# EAGLE board new_board (EAGLE 7.5.0)
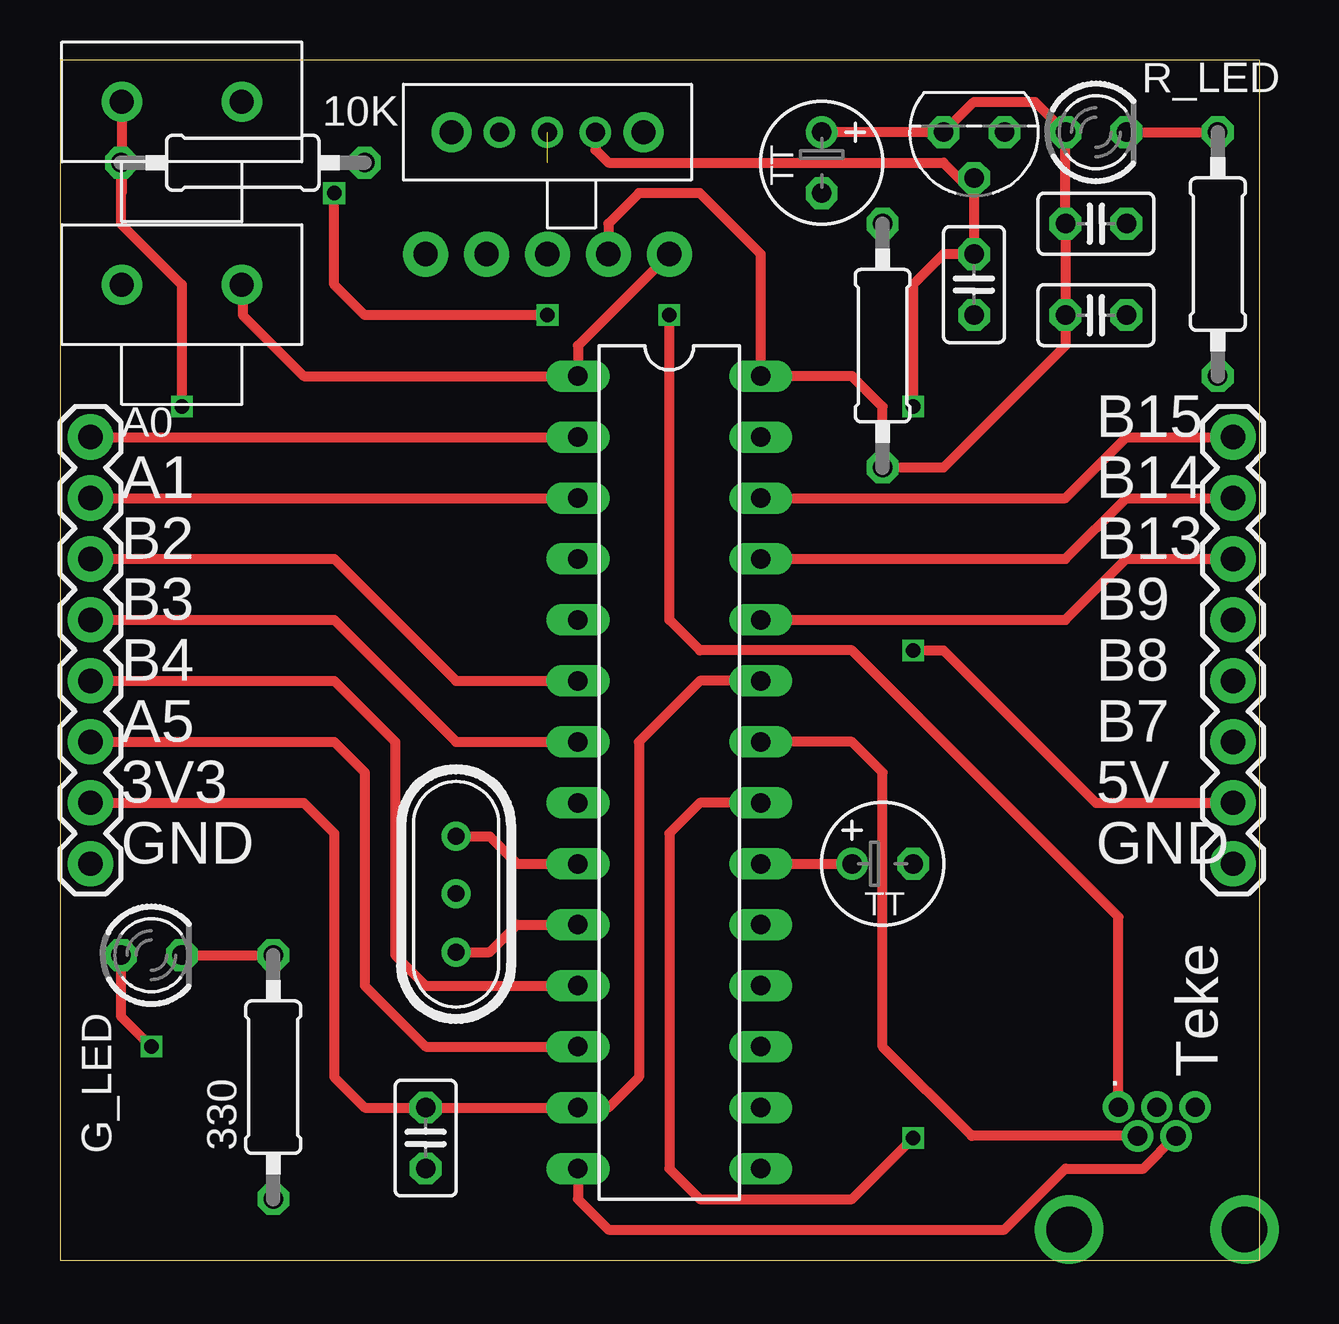
[diagram p0: board, top side]
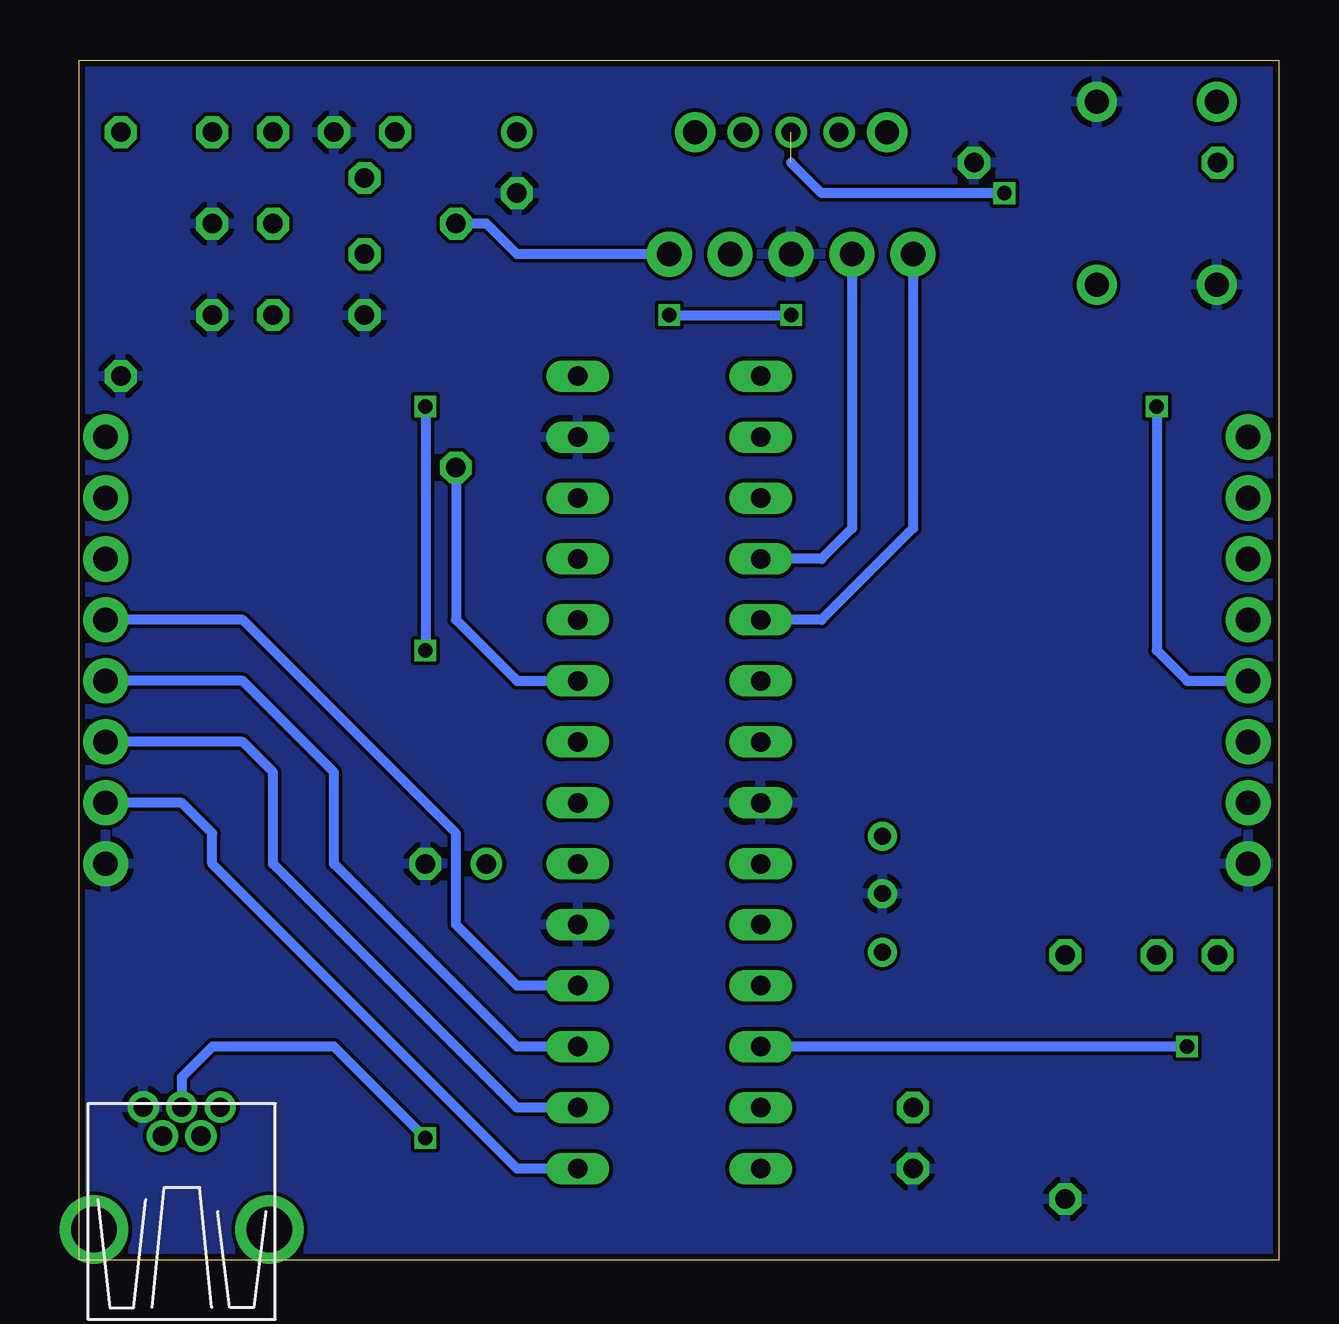
[diagram p1: board, bottom side, seen from below]

Size 50 x 50 mm. Coordinates in mm from the lower left corner, seen from the top.
Outline: 0,0 50,0 50,50 0,50 0,0
Copper layers (1*16): Top 0.035mm / dielectric 1.5mm / Bottom 0.035mm
Design rules "SeeedStudio_2layer_DRU_no_angle_20140221": minimum track width 6mil, minimum drill 12mil, track to track 6mil, track to pad 6mil, pad to pad 6mil, via to via 6mil, smd to smd 0mil, copper to edge 10mil, drill to drill 10mil, minimum pad ring 10mil, minimum via ring 6mil, stop-mask expansion 2mil, vias tented up to drill 100mil, thermal gap 10mil

## Footprints (pad centres in the part's own frame; a part is rotated, then mirrored left to right if it is on the bottom)
0207/10 = drill 0.813 octagon: 1 -5.08,0; 2 5.08,0
USB-MB-H = drill 0.8: D+ 5.1,0; D- 3.9,0.8; GND 5.1,-1.6; ID 3.9,-0.8; VBUS 5.1,1.6 | drill 1.9: P$6 0,-3.65; P$7 0,3.65
C025-025X050 = drill 0.813 octagon: 1 -1.27,0; 2 1.27,0
TT2D5 = drill 0.813: + -1.27,0 | drill 0.813 octagon: - 1.27,0
LED3MM = drill 0.813 octagon: A -1.27,0; K 1.27,0
1X05_NO_SILK = drill 1.016 pad 1.88: 1 0,0; 2 2.54,0; 3 5.08,0; 4 7.62,0; 5 10.16,0
1X08_ROUND = drill 1.016 pad 1.88: 1 0,0; 2 2.54,0; 3 5.08,0; 4 7.62,0; 5 10.16,0; 6 12.7,0; 7 15.24,0; 8 17.78,0
DIL28-3 = drill 0.813 long: 1 -16.51,-3.81; 2 -13.97,-3.81; 3 -11.43,-3.81; 4 -8.89,-3.81; 5 -6.35,-3.81; 6 -3.81,-3.81; 7 -1.27,-3.81; 8 1.27,-3.81; 9 3.81,-3.81; 10 6.35,-3.81; 11 8.89,-3.81; 12 11.43,-3.81; 13 13.97,-3.81; 14 16.51,-3.81; 15 16.51,3.81; 16 13.97,3.81; 17 11.43,3.81; 18 8.89,3.81; 19 6.35,3.81; 20 3.81,3.81; 21 1.27,3.81; 22 -1.27,3.81; 23 -3.81,3.81; 24 -6.35,3.81; 25 -8.89,3.81; 26 -11.43,3.81; 27 -13.97,3.81; 28 -16.51,3.81
SLIDE_SWITCH = drill 1 pad 1.676: P$1 -4,0; P$2 4,0 | drill 0.8 pad 1.27: P$3 -2,0; P$4 0,0; P$5 2,0
PUSH_BUTTON = drill 1 pad 1.676: P$1 -2.5,0; P$2 2.5,0
TO92 = drill 0.813 octagon: 1 -1.27,0; 2 0,1.905; 3 1.27,0
HC49-3L = drill 0.7 pad 1.2: 1 -2.413,0; 2 -0.027,0; 3 2.413,0

## Placement (x,y rotation side)
10K  [0207/10]  7.62,45.72 0 top
330  [0207/10]  8.89,7.62 90 top
.  MINI_USB  [USB-MB-H]  45.72,1.27 90 top
C1  0.1uF  [C025-025X050]  43.18,43.18 0 top
C3  0.1uF  [C025-025X050]  43.18,39.37 0 top
C4  0.1uF  [C025-025X050]  15.24,5.08 270 top
C5  0.1uF  [C025-025X050]  38.1,40.64 270 top
C6  10uF  [TT2D5]  34.29,16.51 0 top
C7  10uF  [TT2D5]  31.75,45.72 270 top
G_LED  [LED3MM]  3.81,12.7 0 top
J1  [1X05_NO_SILK]  25.4,41.91 180 top
J2  [1X08_ROUND]  1.27,34.29 270 top
J3  [1X08_ROUND]  48.9,34.29 270 top
R2  330  [0207/10]  48.26,41.91 90 top
R4  10K  [0207/10]  34.29,38.1 90 top
R_LED  [LED3MM]  43.18,46.99 0 top
U$1  PIC32  [DIL28-3]  25.4,20.32 270 top
U$3  SLIDE_SWITCH  [SLIDE_SWITCH]  20.32,46.99 180 top
U$4  PUSH_BUTTON  [PUSH_BUTTON]  5.08,40.64 180 top
U$5  PUSH_BUTTON  [PUSH_BUTTON]  5.08,48.26 180 top
U$9  MCP1702  [TO92]  38.1,46.99 180 top
X1  HC49-HC49-3L  [HC49-3L]  16.51,15.24 270 top

## Library data of the parts
10K 330 . C1 C3-C7 G_LED J1 R2 R4 R_LED U$1 U$3-U$5 U$9 = new_library
J2 J3 = new_library; PROD_ID: CONN-08437
X1 = new_library; MFD: IQD Frequency Products

## Nets
+3V3: C1.1 C3.1 C4.1 C7.+ J1.2 J2.7 R4.1 R_LED.A U$1.13 U$1.23 U$1.28 U$9.3
GND: 10K.2 330.1 ..GND C1.2 C3.2 C4.2 C5.2 C6.- C7.- J1.3 J2.8 J3.8 R2.1 U$1.8 U$1.19 U$1.27 U$4.P$2 U$5.P$1 U$9.1 X1.2
N$1: ..ID U$1.14
N$2: J1.4 U$1.4
N$3: J1.5 U$1.5
N$4: U$1.9 X1.1
N$5: U$1.10 X1.3
N$6: 10K.1 J2.5 U$1.11 U$5.P$2
N$8: R2.2 R_LED.K
N$9: J1.1 R4.2 U$1.1 U$4.P$1
N$10: C6.+ U$1.20
N$11: 330.2 G_LED.K
N$12: G_LED.A J2.6 U$1.12
N$13: ..VBUS U$3.P$4
N$14: C5.1 J3.7 U$1.15 U$3.P$3 U$9.2
N$15: ..D- U$1.22
N$16: ..D+ U$1.21
N$19: J2.1 U$1.2
N$20: J2.2 U$1.3
N$21: J2.3 U$1.6
N$22: J2.4 U$1.7
N$23: J3.1 U$1.26
N$24: J3.2 U$1.25
N$25: J3.3 U$1.24
N$26: J3.4 U$1.18
N$27: J3.5 U$1.17
N$28: J3.6 U$1.16

## Tracks (layer width: path | path; a pad name or v marks a point on that pad's centre or on a via)
+3V3
  Top 0.406: J2.7 10.16,19.05 11.43,17.78 11.43,7.62 12.7,6.35 C4.1 U$1.13 22.86,6.35 24.13,7.62 24.13,21.59 26.67,24.13 U$1.23 | C7.+ U$9.3 38.1,48.26 40.64,48.26 R_LED.A C1.1 C3.1 41.91,38.1 36.83,33.02 R4.1 34.29,35.56 33.02,36.83 U$1.28 29.21,41.91 26.67,44.45 24.13,44.45 22.86,43.18 J1.2
  Bottom 0.406: R4.1 34.29,26.67 31.75,24.13 U$1.23
GND
  pour Bottom: -1.27,50.8 -1.27,-2.54 52.07,-2.54 52.07,-1.27 52.07,50.8
N$1
  Top 0.406: U$1.14 21.59,2.54 22.86,1.27 39.37,1.27 41.91,3.81 45.16,3.81 ..ID
N$2
  Bottom 0.406: J1.4 17.78,30.48 19.05,29.21 U$1.4
N$3
  Bottom 0.406: J1.5 15.24,30.48 19.05,26.67 U$1.5
N$4
  Top 0.406: X1.1 17.91,17.65 19.05,16.51 U$1.9
N$5
  Top 0.406: X1.3 17.91,12.83 19.05,13.97 U$1.10
N$6  (via drill 0.6)
  Top 0.406: J2.5 11.43,24.13 13.97,21.59 13.97,12.7 15.24,11.43 U$1.11 | U$5.P$2 2.58,44.49 10K.1 2.54,43.18 5.08,40.64 v5.08,35.56
  Bottom 0.406: v5.08,35.56 5.08,25.4 3.81,24.13 J2.5
N$8
  Top 0.406: R_LED.K R2.2
N$9
  Top 0.406: U$4.P$1 7.62,40.64 7.62,39.37 10.16,36.83 U$1.1 21.59,38.1 J1.1
  Bottom 0.406: J1.1 31.75,41.91 33.02,43.18 R4.2
N$10
  Top 0.406: U$1.20 C6.+
N$11
  Top 0.406: G_LED.K 330.2
N$12  (via drill 0.6)
  Top 0.406: G_LED.A 2.54,10.16 v3.81,8.89 | J2.6 11.43,21.59 12.7,20.32 12.7,11.43 15.24,8.89 U$1.12
  Bottom 0.406: v3.81,8.89 U$1.12
N$13  (via drill 0.6)  (1 unrouted)
  Top 0.406: ..VBUS 44.12,14.3 33.02,25.4 26.67,25.4 25.4,26.67 v25.4,39.37 | v20.32,39.37 12.7,39.37 11.43,40.64 v11.43,44.45
  Bottom 0.406: v25.4,39.37 v20.32,39.37 | v11.43,44.45 19.05,44.45 20.32,45.72
N$14  (via drill 0.6)
  Top 0.406: U$9.2 38.1,44.45 | 38.1,44.45 C5.1 36.83,41.91 35.56,40.64 v35.56,35.56 | U$3.P$3 22.32,46.26 22.86,45.72 36.83,45.72 38.1,44.45 | v35.56,25.4 36.83,25.4 43.18,19.05 J3.7
  Bottom 0.406: U$1.15 31.75,3.81 44.45,16.51 44.45,17.78 45.72,19.05 J3.7 | v35.56,35.56 v35.56,25.4
N$15
  Top 0.406: ..D- 38.01,5.17 34.29,8.89 34.29,20.32 33.02,21.59 U$1.22
N$16  (via drill 0.6)
  Top 0.406: U$1.21 26.67,19.05 25.4,17.78 25.4,3.81 26.67,2.54 33.02,2.54 v35.56,5.08
  Bottom 0.406: v35.56,5.08 39.37,8.89 44.45,8.89 45.72,7.62 ..D+
N$19
  Top 0.406: J2.1 U$1.2
N$20
  Top 0.406: J2.2 U$1.3
N$21
  Top 0.406: J2.3 11.43,29.21 16.51,24.13 U$1.6
N$22
  Top 0.406: J2.4 11.43,26.67 16.51,21.59 U$1.7
N$23
  Top 0.406: U$1.26 41.91,31.75 44.45,34.29 J3.1
N$24
  Top 0.406: U$1.25 41.91,29.21 44.45,31.75 J3.2
N$25
  Top 0.406: U$1.24 41.91,26.67 44.45,29.21 J3.3
N$26
  Bottom 0.406: U$1.18 31.75,11.43 34.29,13.97 34.29,17.78 43.18,26.67 J3.4
N$27
  Bottom 0.406: U$1.17 31.75,8.89 39.37,16.51 39.37,20.32 43.18,24.13 J3.5
N$28
  Bottom 0.406: U$1.16 31.75,6.35 41.91,16.51 41.91,20.32 43.18,21.59 J3.6

## Text on the board
tPlace: A0 | B15 | A1 | B14 | B2 | B13 | B3 | B9 | B4 | B8 | A5 | B7 | 3V3 | 5V | GND | GND | Teke